# Altium PCB OpenMoteSTM-Border.PcbDoc (part 2 of 2)
Units mil, origin at the board's own origin, x right, y up, seen from the top; angles counter-clockwise.
Board outline 3923 x 2926 mil, 2 copper layers (Top Layer, Bottom Layer); 88 components, 131 nets, 421 pads, 102 vias.
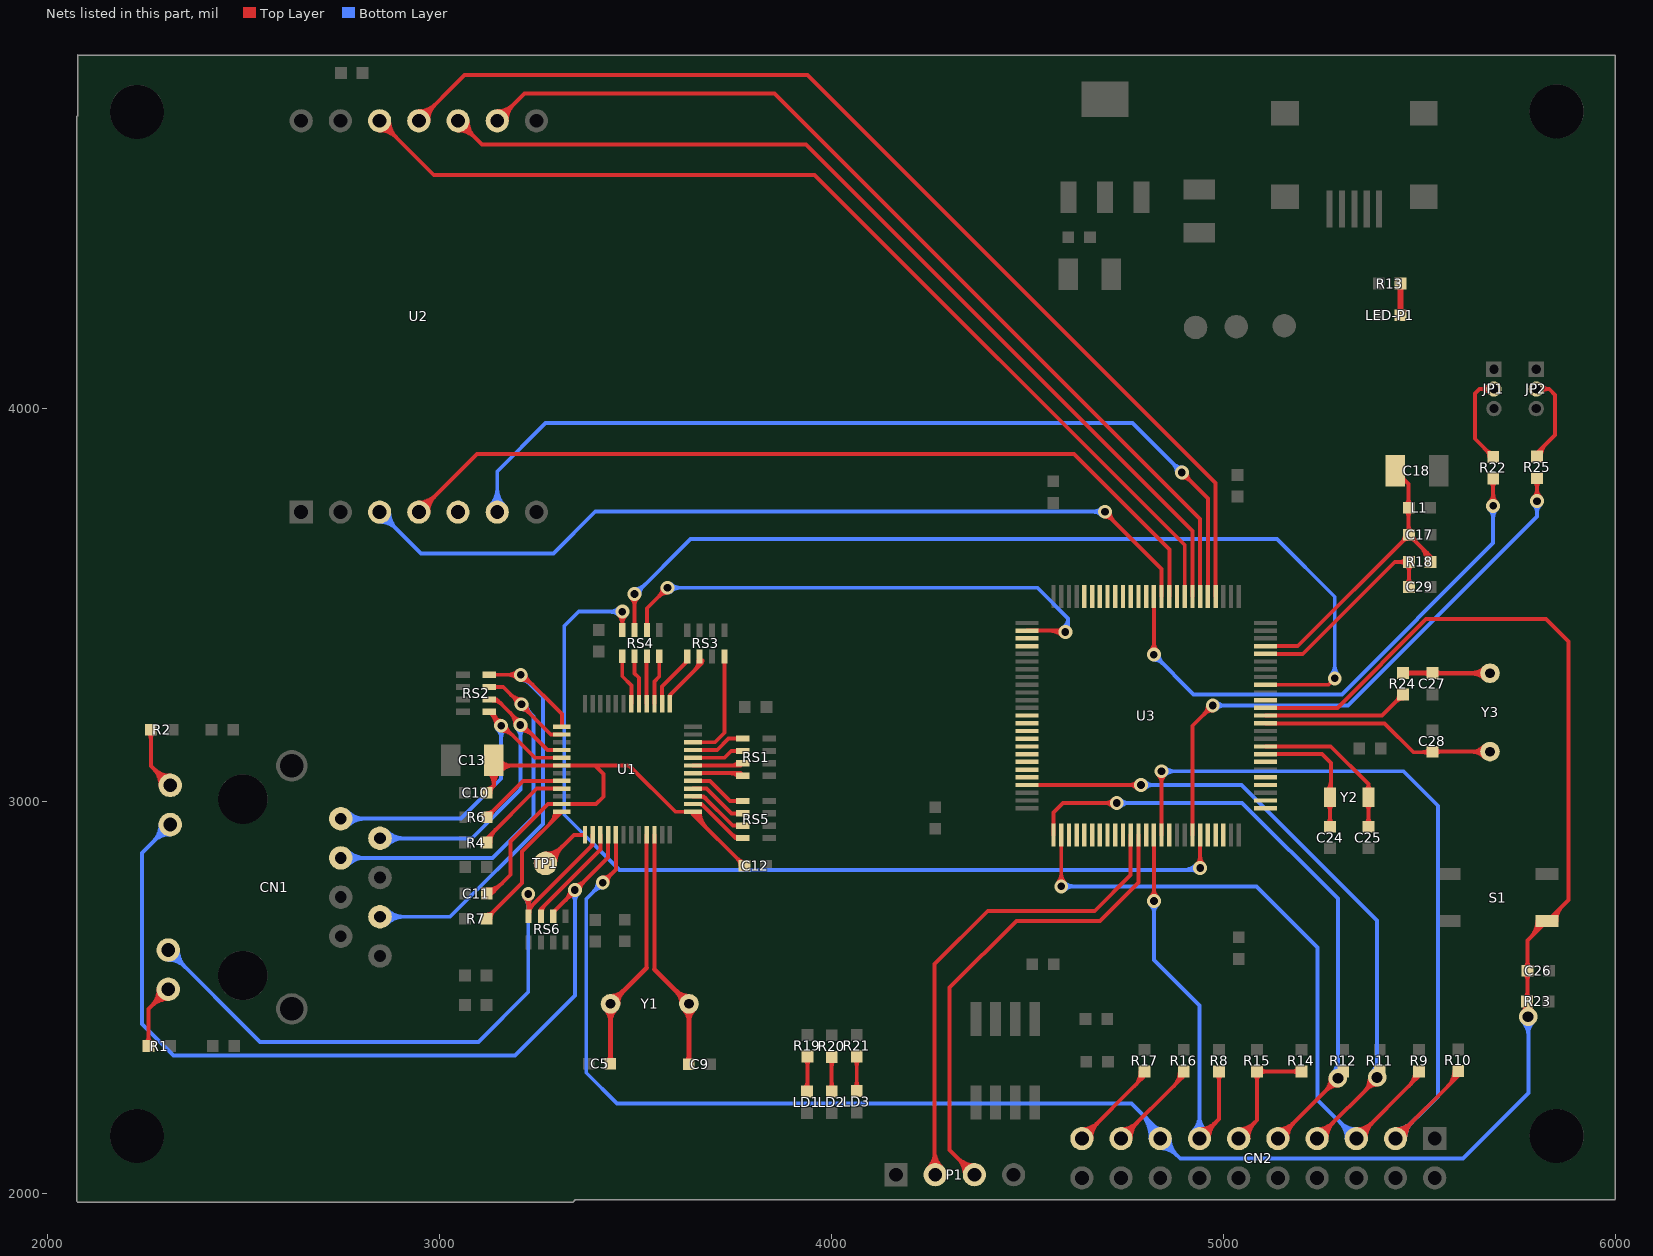
[diagram p2: the nets of this part, all layers, seen from the top]

## Via types
v1: diameter 35.43, hole 19.68, Top Layer to Bottom Layer, 70 vias
v2: diameter 47.24, hole 27.56, Top Layer to Bottom Layer, 15 vias
v3: diameter 47.24, hole 23.62, Top Layer to Bottom Layer, 14 vias
v4: diameter 35.43, hole 35.43, Top Layer to Bottom Layer, 2 vias
v5: diameter 31.5, hole 19.68, Top Layer to Bottom Layer, 1 vias

## Nets (pads, with @x,y where several pads share a name; then routed paths per layer and width w, separated by ;. In a path a pad name is that pad's centre, name@x,y a point inside that pad or via, vN(x,y) a via of type N, cw(c..) or ccw(c..) an arc to the next point about the centre after c; other vN are vias at no path point) (continued)
MII_TXD1: RS4.3 U3.52 | length 1513.2
  Top Layer w10: RS4.3@3528.75,3436.5 3528.75,3491.75 v1(3581,3544) ; v1@3568.28,3544 cw(c3537.58,3544) 3559.29,3522.29 cw(c3581,3500.58) v1@3581,3531.28 ; U3.52@4498.4,3434 U3.52@4497.87,3434.54 4592.46,3434.54 v1(4596,3431) ; 4556.76,3434.54 cw(c4556.76,3391.76) v1@4587.01,3422.01 ; 4573.83,3434.54 ccw(c4573.83,3453.17) v1@4587.01,3439.99
  Bottom Layer w10: v1(3581,3544) 4525,3544 4603,3466 ; v1@3589.99,3535.01 cw(c3611.7,3513.3) 3611.7,3544 cw(c3611.7,3574.7) v1@3589.99,3552.99 ; v1@4589.41,3441.88 ccw(c4574.8,3466) 4603,3466 ; v1@4594.59,3433.32 ccw(c4585.55,3448.25) 4603,3448.25 ; v1(4596,3431) 4603,3438 4603,3466
MII_TXD2: RS4.5 U3.17 | length 2533.6
  Top Layer w10: v1@3488.01,3519.01 cw(c3466.3,3497.3) 3497,3497.3 cw(c3527.7,3497.3) v1@3505.99,3519.01 ; v1(3497,3528) 3497,3436.75 RS4.5@3497.25,3436.5 ; U3.17@5106.13,3296.74 5266.74,3296.74 v1(5283,3313)
  Bottom Layer w10: v1(3497,3528) 3498,3527 3499,3527 3640,3668 5136,3668 5283,3521 v1(5283,3313) ; v1@3497,3540.72 ccw(c3497,3578.66) 3523.83,3551.83 ; v1@3509.72,3528 cw(c3533.17,3528) 3516.59,3544.59 ; v1@5274.01,3321.99 ccw(c5252.3,3343.7) 5283,3343.7 ccw(c5313.7,3343.7) v1@5291.99,3321.99
MII_TXD3: RS4.7 U3.95 | length 2669.9
  Top Layer w10: v1@3457.01,3474.01 cw(c3435.89,3452.89) RS4.7@3465.76,3452.89 ; RS4.7@3465.76,3436.5 3465.76,3482.76 v1(3466,3483) ; RS4.7@3465.76,3451.71 cw(c3497.29,3451.71) v1@3474.99,3474.01 ; v1@4930.8,2838.2 ccw(c4909.1,2859.91) 4939.8,2859.91 ccw(c4970.5,2859.91) v1@4948.79,2838.2 ; v1(4939.8,2829.2) U3.95@4939.8,2913.87
  Bottom Layer w10: v1@3457.01,3474.01 ccw(c3435.3,3452.3) 3435.3,3483 ccw(c3435.3,3513.7) v1@3457.01,3491.99 ; v1(3466,3483) 3355,3483 3318,3446 3318,2965 3459,2824 4934.59,2824 v1(4939.8,2829.2) ; 4896.53,2824 ccw(c4896.53,2872.47) v1@4930.8,2838.2 ; 4920.67,2824 ccw(c4920.67,2848.33) v1@4937.87,2831.13 ; 4921.66,2824 cw(c4921.66,2811.07) v1@4930.8,2820.21
NetC5_2: C5.2 U1.33 Y1.1 | length 800.3
  Top Layer w10: 3528.21,2575.21 U1.33@3528.21,2913.68
  Top Layer w12: Y1.1@3422.56,2469.56 cw(c3390.13,2437.13) 3436,2437.13 cw(c3481.87,2437.13) Y1.1@3449.44,2469.56 ; C5.2@3429.14,2336.36 ccw(c3412.57,2352.93) 3436,2352.93 ; C5.2@3435.5,2330 3436,2330.5 Y1.1@3436,2483 3528.21,2575.21 ; 3436,2350.52 ccw(c3456.02,2350.52) C5.2@3441.86,2336.36 ; Y1.1@3436,2502 ccw(c3436,2547.87) 3468.44,2515.44 ccw(c3500.87,2483) Y1.1@3455,2483
NetC9_2: C9.2 U1.34 Y1.2 | length 799.6
  Top Layer w10: 3547.9,2571.1 U1.34@3547.9,2913.68
  Top Layer w12: 3547.9,2571.1 Y1.2@3636,2483 3636,2329.5 C9.2@3635.5,2329 ; Y1.2@3617,2483 ccw(c3571.13,2483) 3603.56,2515.44 ccw(c3636,2547.87) Y1.2@3636,2502 ; Y1.2@3622.56,2469.56 cw(c3590.13,2437.13) 3636,2437.13 cw(c3681.87,2437.13) Y1.2@3649.44,2469.56 ; C9.2@3629.14,2335.36 ccw(c3612.57,2351.93) 3636,2351.93 ; 3636,2349.52 ccw(c3656.02,2349.52) C9.2@3641.86,2335.36
NetC10_2: C10.2 C11.2 C12.2 C13.1 U1.18 U1.23 U1.37 | length 1827
  Top Layer w10: C10.2@3119.5,3021 3138.41,3039.91 3138.41,3118.87 3166.44,3090.84 ; C10.2@3119.5,3031 ccw(c3119.5,3055.14) 3136.57,3038.07 ccw(c3153.64,3021) C10.2@3129.5,3021 ; C11.2@3120.5,2774 ccw(c3120.5,2828.32) 3158.91,2789.91 ; C13.1@3124.26,3074.73 cw(c3090.12,3040.59) 3138.41,3040.59 cw(c3186.69,3040.59) 3152.55,3074.73 cw(c3191.44,3035.84) 3191.44,3090.84 ; 3141.84,2772.84 cw(c3120.5,2794.18) C11.2@3120.5,2764 3133,2764 3181,2812 3181,2897 3276.42,2992.42 U1.23@3311.68,2992.42 3399.42,2992.42 3418,3011 3418,3068.84 3396,3090.84 ; C13.1@3145.48,3081.8 cw(c3167.3,3059.98) 3167.3,3090.84 ; C13.1@3152.55,3103.02 ccw(c3181.94,3132.41) 3181.94,3090.84 ; C13.1@3156.61,3097.17 ccw(c3166.44,3101.65) 3166.44,3090.84 ; C13.1@3157.83,3084.09 cw(c3166.44,3081.98) 3166.44,3090.84 ; U1.37@3643.82,2972.73 ccw(c3653.61,2972.73) 3646.69,2965.81 ; U1.37@3653.82,2972.73 ccw(c3687.76,2972.73) 3663.76,2948.74 ; U1.37@3663.82,2972.73 ccw(c3721.9,2972.73) 3680.83,2931.67 ; C12.2@3767.5,2835 ccw(c3743.36,2835) 3760.43,2852.07 ccw(c3777.5,2869.14) C12.2@3777.5,2845 ; C12.2@3777.5,2835 3646.32,2966.18 U1.37@3646.32,2972.73 3601.27,2972.73 3483.16,3090.84 3396,3090.84 ; 3166.44,3090.84 U1.18@3311.68,3090.84 3396,3090.84
NetC27_1: C27.1 R24.2 Y3.2 | length 396.7
  Top Layer w12: R24.2@5457,3326.5 C27.1@5532,3326.5 5532.5,3326 Y3.2@5679,3326 ; R24.2@5463.36,3320.14 cw(c5478.73,3304.77) 5478.73,3326.5 cw(c5478.73,3348.23) R24.2@5463.36,3332.86 ; C27.1@5525.64,3320.14 ccw(c5510.27,3304.77) 5510.27,3326.5 ccw(c5510.27,3348.23) C27.1@5525.64,3332.86 ; C27.1@5538.36,3320.14 cw(c5552.52,3305.98) 5552.52,3326 ; C27.1@5538.36,3332.86 ccw(c5554.94,3349.43) 5554.94,3326 ; Y3.2@5665.56,3312.56 ccw(c5633.13,3280.13) 5633.13,3326 ccw(c5633.13,3371.87) Y3.2@5665.56,3339.44
NetC28_1: C28.1 U3.12 Y3.1 | length 755.8
  Top Layer w10: U3.12@5106.13,3198.31 5409.69,3198.31 5483.5,3124.5 5531,3124.5 C28.1@5532,3125.5 5532.5,3126 Y3.1@5679,3126 ; 5505.44,3124.5 ccw(c5505.44,3152.06) C28.1@5524.93,3132.57 ; 5510.27,3124.5 cw(c5510.27,3103.77) C28.1@5524.93,3118.43 ; C28.1@5539.07,3118.43 cw(c5557.35,3100.15) 5557.35,3126 ; C28.1@5539.07,3132.57 ccw(c5554.94,3148.43) 5554.94,3126 ; Y3.1@5664.86,3111.86 ccw(c5630.72,3077.72) 5630.72,3126 ccw(c5630.72,3174.28) Y3.1@5664.86,3140.14
NetCN1_1: CN1.1 RS2.8 U1.17 | length 1140
  Top Layer w10: RS2.8@3126.5,3227.76 3243.73,3110.53 U1.17@3311.68,3110.53 ; RS2.8@3131.58,3222.68 cw(c3100.89,3192) v1@3144.28,3192 ; RS2.8@3139,3227.76 ccw(c3169.18,3227.76) v1@3147.84,3206.42 ; 3144.26,3209.99 ccw(c3157,3222.73) v1@3157,3204.72 ; v1@3157,3179.28 cw(c3157,3135.89) 3187.68,3166.58 ; v1@3169.72,3192 ccw(c3187.73,3192) 3174.99,3179.26
  Bottom Layer w10: CN1.1@2748,2955 3055,2955 3157,3057 v1(3157,3192) ; CN1.1@2758.61,2944.39 cw(c2784.21,2918.79) 2784.21,2955 cw(c2784.21,2991.21) CN1.1@2758.61,2965.61 ; CN1.1@2765.68,2937.32 cw(c2808.36,2894.64) 2808.36,2955 cw(c2808.36,3015.36) CN1.1@2765.68,2972.68 ; v1@3148.01,3183.01 cw(c3126.3,3161.3) 3157,3161.3 cw(c3187.7,3161.3) v1@3165.99,3183.01
NetCN1_2: CN1.2 RS2.6 U1.16 | length 1147.3
  Top Layer w10: RS2.6@3126.5,3259.25 3145.75,3259.25 3274.79,3130.21 U1.16@3311.68,3130.21 ; RS2.6@3136.13,3256.38 cw(c3136.13,3226.21) 3157.46,3247.54 ; RS2.6@3137.38,3256.67 cw(c3142.41,3246.29) 3150.56,3254.44 ; 3180.76,3224.24 cw(c3150.51,3194) v1@3193.28,3194 ; 3192.83,3212.17 ccw(c3206,3225.35) v1@3206,3206.72 ; v1@3206,3181.28 cw(c3206,3138.51) 3236.24,3168.76 ; v1@3218.72,3194 ccw(c3237.35,3194) 3224.17,3180.83
  Bottom Layer w10: CN1.2@2848,2905 3082,2905 3206,3029 v1(3206,3194) ; CN1.2@2858.61,2894.39 cw(c2884.21,2868.79) 2884.21,2905 cw(c2884.21,2941.21) CN1.2@2858.61,2915.61 ; CN1.2@2865.68,2887.32 cw(c2908.36,2844.64) 2908.36,2905 cw(c2908.36,2965.36) CN1.2@2865.68,2922.68 ; v1@3197.01,3185.01 cw(c3175.3,3163.3) 3206,3163.3 cw(c3236.7,3163.3) v1@3214.99,3185.01
NetCN1_3: CN1.3 RS2.4 U1.14 | length 1367.1
  Top Layer w10: RS2.4@3126.5,3290.75 3162.25,3290.75 3283.42,3169.58 U1.14@3311.68,3169.58 ; 3182.17,3270.83 ccw(c3209,3297.66) v1@3209,3259.72 ; 3189.41,3263.59 cw(c3172.83,3247) v1@3196.28,3247 ; v1@3209,3234.28 cw(c3209,3210.83) 3225.59,3227.41 ; v1@3221.72,3247 ccw(c3259.66,3247) 3232.83,3220.17
  Bottom Layer w10: CN1.3@2748,2855 3135,2855 3240,2960 3240,3216 v1(3209,3247) ; CN1.3@2758.61,2844.39 cw(c2784.21,2818.79) 2784.21,2855 cw(c2784.21,2891.21) CN1.3@2758.61,2865.61 ; CN1.3@2765.68,2837.32 cw(c2808.36,2794.64) 2808.36,2855 cw(c2808.36,2915.36) CN1.3@2765.68,2872.68 ; v1@3209,3234.28 cw(c3209,3203.58) 3230.71,3225.29 cw(c3252.42,3247) v1@3221.72,3247
NetCN1_6: CN1.6 RS2.2 U1.13 | length 1473.8
  Top Layer w10: RS2.2@3126.5,3322.24 3211.76,3322.24 3311.68,3222.32 U1.13@3311.68,3189.27 ; 3175.71,3322.24 cw(c3175.71,3290.71) v1@3198.01,3313.01 ; 3176.89,3322.24 ccw(c3176.89,3352.11) v1@3198.01,3330.99 ; v1@3207,3309.28 cw(c3207,3266.51) 3237.24,3296.76 ; v1@3219.72,3322 ccw(c3238.35,3322) 3225.17,3308.83
  Bottom Layer w10: CN1.6@2848,2705 3027,2705 3264,2942 3264,3265 v1(3207,3322) ; CN1.6@2858.61,2694.39 cw(c2884.21,2668.79) 2884.21,2705 cw(c2884.21,2741.21) CN1.6@2858.61,2715.61 ; CN1.6@2865.68,2687.32 cw(c2908.36,2644.64) 2908.36,2705 cw(c2908.36,2765.36) CN1.6@2865.68,2722.68 ; v1@3207,3309.28 cw(c3207,3278.58) 3228.71,3300.29 cw(c3250.42,3322) v1@3219.72,3322
NetCN1_9: CN1.9 R2.1 | length 352.1
  Top Layer w10: R2.1@2256.43,3174.93 cw(c2239.36,3157.86) 2263.5,3157.86 cw(c2287.64,3157.86) R2.1@2270.57,3174.93 ; R2.1@2263.5,3182 2263.5,3089.5 CN1.9@2313,3040 ; CN1.9@2288,3040 ccw(c2227.64,3040) 2270.32,3082.68 ccw(c2313,3125.36) CN1.9@2313,3065 ; CN1.9@2298,3040 ccw(c2261.79,3040) 2287.39,3065.61 ccw(c2313,3091.21) CN1.9@2313,3055
NetCN1_10: CN1.10 RS6.3 U1.28 | length 2569.9
  Top Layer w10: RS6.3@3289.75,2706.5 3289.75,2715.75 3429.79,2855.79 U1.28@3429.79,2913.68 ; 3321.88,2747.88 ccw(c3296.75,2773) v1@3332.28,2773 ; 3326.71,2752.71 cw(c3345,2734.41) v1@3345,2760.28 ; v1@3345,2785.72 ccw(c3345,2821.25) 3370.12,2796.12 ; v1@3357.72,2773 cw(c3383.59,2773) 3365.29,2791.29
  Bottom Layer w10: CN1.10@2288,2940 cw(c2227.64,2940) 2270.32,2897.32 cw(c2313,2854.64) CN1.10@2313,2915 ; CN1.10@2298,2940 cw(c2261.79,2940) 2287.39,2914.39 cw(c2313,2888.79) CN1.10@2313,2925 ; CN1.10@2313,2940 2241,2868 2241,2431 2321,2351 3192,2351 3345,2504 v1(3345,2773) ; v1@3336.01,2764.01 cw(c3314.3,2742.3) 3345,2742.3 cw(c3375.7,2742.3) v1@3353.99,2764.01
NetCN1_11: CN1.11 RS6.7 U1.26 | length 1932.6
  Top Layer w10: v1@3217.01,2754.01 cw(c3195.3,2732.3) 3226,2732.3 cw(c3256.7,2732.3) v1@3234.99,2754.01 ; v1(3226,2763) 3226,2725.51 3226.76,2724.76 ; RS6.7@3226.76,2706.5 3226.76,2724.76 ; RS6.7@3229.63,2716.13 cw(c3257.4,2716.13) 3237.76,2735.76 ; 3383.72,2881.72 ccw(c3368.77,2896.68) U1.26@3389.92,2896.68 ; U1.26@3390.42,2913.68 3390.42,2888.42 3226.76,2724.76 ; 3226,2724.89 ccw(c3235.52,2724.89) 3228.79,2718.16 cw(c3235.52,2724.89) 3226,2724.89
  Bottom Layer w10: CN1.11@2308,2595 cw(c2308,2534.64) 2350.68,2577.32 cw(c2393.36,2620) CN1.11@2333,2620 ; CN1.11@2308,2605 cw(c2308,2568.79) 2333.61,2594.39 cw(c2359.21,2620) CN1.11@2323,2620 ; CN1.11@2308,2620 2542,2386 3099,2386 3226,2513 v1(3226,2763) ; v1@3217.01,2754.01 cw(c3195.3,2732.3) 3226,2732.3 cw(c3256.7,2732.3) v1@3234.99,2754.01
NetCN1_12: CN1.12 R1.1 | length 355.5
  Top Layer w10: R1.1@2250.43,2382.07 ccw(c2233.36,2399.14) 2257.5,2399.14 ccw(c2281.64,2399.14) R1.1@2264.57,2382.07 ; R1.1@2257.5,2375 2257.5,2469.5 CN1.12@2308,2520 ; CN1.12@2283,2520 cw(c2222.64,2520) 2265.32,2477.32 cw(c2308,2434.64) CN1.12@2308,2495 ; CN1.12@2293,2520 cw(c2256.79,2520) 2282.39,2494.39 cw(c2308,2468.79) CN1.12@2308,2505
NetCN2_11: CN2.11 R14.1 R15.2 | length 565.8
  Top Layer w10: CN2.11@5038,2139 5085,2186 R15.2@5085,2310.5 R14.1@5198,2310.5 ; CN2.11@5038,2153.53 ccw(c5038,2188.6) 5062.8,2163.8 ccw(c5087.6,2139) CN2.11@5052.53,2139 ; CN2.11@5038,2163.53 ccw(c5038,2222.74) 5079.87,2180.87 ccw(c5121.74,2139) CN2.11@5062.53,2139 ; R15.2@5077.93,2303.43 cw(c5060.86,2286.36) 5085,2286.36 cw(c5109.14,2286.36) 5092.07,2303.43 cw(c5109.14,2286.36) 5109.14,2310.5 cw(c5109.14,2334.64) R15.2@5092.07,2317.57 ; R14.1@5190.93,2303.43 ccw(c5173.86,2286.36) 5173.86,2310.5 ccw(c5173.86,2334.64) R14.1@5190.93,2317.57
NetCN2_17: CN2.17 R16.1 | length 452
  Top Layer w10: CN2.17@4738,2139 4894.5,2295.5 4894.5,2307 R16.1@4898,2310.5 ; CN2.17@4738,2153.53 ccw(c4738,2188.6) 4762.8,2163.8 ccw(c4787.6,2139) CN2.17@4752.53,2139 ; CN2.17@4738,2163.53 ccw(c4738,2222.74) 4779.87,2180.87 ccw(c4821.74,2139) CN2.17@4762.53,2139 ; 4872.8,2273.8 ccw(c4836.09,2310.5) R16.1@4888,2310.5 ; 4889.87,2290.87 ccw(c4870.24,2310.5) R16.1@4898,2310.5 ; R16.1@4894.5,2310.5 R16.1@4898,2310.5
NetCN2_19: CN2.19 R17.1 | length 452
  Top Layer w10: CN2.19@4638,2139 4794.5,2295.5 4794.5,2307 R17.1@4798,2310.5 ; CN2.19@4638,2153.53 ccw(c4638,2188.6) 4662.8,2163.8 ccw(c4687.6,2139) CN2.19@4652.53,2139 ; CN2.19@4638,2163.53 ccw(c4638,2222.74) 4679.87,2180.87 ccw(c4721.74,2139) CN2.19@4662.53,2139 ; 4772.8,2273.8 ccw(c4736.09,2310.5) R17.1@4788,2310.5 ; 4789.87,2290.87 ccw(c4770.24,2310.5) R17.1@4798,2310.5 ; R17.1@4794.5,2310.5 R17.1@4798,2310.5
NetJP1_2: JP1.2 R22.2 | length 328.1
  Top Layer w10: R22.2@5677,3877.5 ccw(c5652.86,3877.5) 5669.93,3894.57 ccw(c5687,3911.64) R22.2@5687,3887.5 ; JP1.2@5678.62,4040.62 ccw(c5653.55,4015.55) 5653.55,4051 ccw(c5653.55,4086.45) JP1.2@5678.62,4061.38 ; R22.2@5687,3877.5 5640.54,3923.96 5640.54,4039.54 5652,4051 JP1.2@5689,4051
NetJP2_2: JP2.2 R25.1 | length 335.6
  Top Layer w10: JP2.2@5797,4051 5830,4051 ; 5805.72,3894.72 ccw(c5821.94,3878.5) R25.1@5799,3878.5 5799,3888 5845,3934 5845,4036 5830,4051 ; JP2.2@5807.91,4041.17 cw(c5830,4021.27) 5830,4051 ; JP2.2@5807.91,4060.83 ccw(c5830,4080.73) 5830,4051 ; R25.1@5809,3878.5 cw(c5856.08,3878.5) 5822.79,3911.79
NetLD1_1: LD1.1 R19.2 | length 165.3
  Top Layer w10: LD1.1@3929.93,2266.57 ccw(c3910.44,2286.06) 3938,2286.06 ; R19.2@3930.93,2341.43 cw(c3913.86,2324.36) 3938,2324.36 cw(c3962.14,2324.36) R19.2@3945.07,2341.43 ; LD1.1@3937,2259.5 3938,2260.5 R19.2@3938,2348.5 ; 3938,2281.23 ccw(c3958.73,2281.23) LD1.1@3944.07,2266.57
NetLD2_1: LD2.1 R20.2 | length 163.8
  Top Layer w10: LD2.1@3992.93,2266.57 ccw(c3975.86,2283.64) 4000,2283.64 ccw(c4024.14,2283.64) LD2.1@4007.07,2266.57 ; R20.2@3992.93,2340.43 cw(c3975.86,2323.36) 4000,2323.36 cw(c4024.14,2323.36) R20.2@4007.07,2340.43 ; LD2.1@4000,2259.5 R20.2@4000,2347.5
NetLD3_1: LD3.1 R21.2 | length 163.8
  Top Layer w10: LD3.1@4056.93,2267.57 ccw(c4039.86,2284.64) 4064,2284.64 ccw(c4088.14,2284.64) LD3.1@4071.07,2267.57 ; R21.2@4056.93,2341.43 cw(c4039.86,2324.36) 4064,2324.36 cw(c4088.14,2324.36) R21.2@4071.07,2341.43 ; LD3.1@4064,2260.5 R21.2@4064,2348.5
NetLED-P1_1: LED-P1.1 R13.1 | length 137.9
  Top Layer w15: LED-P1.1@5445.2,4244.3 ccw(c5432.39,4257.11) 5450.5,4257.11 ccw(c5468.61,4257.11) LED-P1.1@5455.8,4244.3 ; R13.1@5445.2,4314.7 cw(c5432.39,4301.89) 5450.5,4301.89 cw(c5468.61,4301.89) R13.1@5455.8,4314.7 ; LED-P1.1@5450.5,4239 R13.1@5450.5,4320
NetR4_1: R4.1 U1.21 | length 309.8
  Top Layer w10: 3126.22,2910.22 ccw(c3142.43,2894) R4.1@3119.5,2894 3119.5,2903.5 3247.79,3031.79 U1.21@3311.68,3031.79 ; R4.1@3129.5,2894 cw(c3176.58,2894) 3143.29,2927.29
NetR6_1: R6.1 U1.20 | length 267.4
  Top Layer w10: R6.1@3120.5,2959 3212.97,3051.47 U1.20@3311.68,3051.47 ; R6.1@3120.5,2969 ccw(c3120.5,2993.14) 3137.57,2976.07 ccw(c3154.64,2959) R6.1@3130.5,2959
NetR7_2: R7.2 U1.24 | length 437.7
  Top Layer w10: R7.2@3119.5,2700 3210,2790.5 3210,2871.05 U1.24@3311.68,2972.73 ; R7.2@3119.5,2710 ccw(c3119.5,2734.14) 3136.57,2717.07 ccw(c3153.64,2700) R7.2@3129.5,2700 ; 3281.8,2942.86 ccw(c3251.93,2972.73) U1.24@3294.18,2972.73 ; 3298.87,2959.93 ccw(c3286.07,2972.73) U1.24@3304.18,2972.73
NetR24_1: R24.1 U3.13 | length 410.9
  Top Layer w10: U3.13@5106.13,3218 5403.5,3218 R24.1@5457,3271.5 ; R24.1@5447,3271.5 cw(c5422.86,3271.5) 5439.93,3254.43 cw(c5457,3237.36) R24.1@5457,3261.5
NetR25_2: R25.2 U3.94 | length 1706.6
  Top Layer w10: U3.94@4920.11,2913.87 4920.11,3192.11 v1(4972,3244) ; v1@4959.28,3244 cw(c4928.58,3244) 4950.29,3222.29 cw(c4972,3200.58) v1@4972,3231.28 ; v1@5790.01,3773.99 ccw(c5768.3,3795.7) 5799,3795.7 ccw(c5829.7,3795.7) v1@5807.99,3773.99 ; R25.2@5791.93,3816.43 cw(c5774.86,3799.36) 5799,3799.36 cw(c5823.14,3799.36) R25.2@5806.07,3816.43 ; v1(5799,3765) R25.2@5799,3823.5
  Bottom Layer w10: v1(4972,3244) 5317,3244 5799,3726 v1(5799,3765) ; v1@4980.99,3235.01 cw(c5002.7,3213.3) 5002.7,3244 cw(c5002.7,3274.7) v1@4980.99,3252.99 ; v1@5790.01,3756.01 cw(c5768.3,3734.3) 5799,3734.3 cw(c5829.7,3734.3) v1@5807.99,3756.01
NetRS1_1: RS1.1 U1.45 | length 139.2
  Top Layer w10: U1.45@3646.32,3130.21 3708.21,3130.21 3737.24,3159.24 RS1.1@3773.5,3159.24
NetRS1_3: RS1.3 U1.44 | length 134.3
  Top Layer w10: U1.44@3646.32,3110.53 3726.53,3110.53 3743.75,3127.75 RS1.3@3773.5,3127.75
NetRS1_5: RS1.5 U1.43 | length 149.4
  Top Layer w10: U1.43@3646.32,3090.84 3768.09,3090.84 RS1.5@3773.5,3096.25 ; 3743.88,3090.84 ccw(c3743.88,3116.25) RS1.5@3761.84,3098.28
NetRS1_7: RS1.7 U1.42 | length 153
  Top Layer w10: U1.42@3646.32,3071.16 3767.1,3071.16 RS1.7@3773.5,3064.76 RS1.7@3773.1,3065.16 ; 3741.48,3071.16 cw(c3741.48,3042.36) RS1.7@3761.84,3062.72
NetRS3_2: RS3.2 U1.46 | length 284.3
  Top Layer w10: U1.46@3646.32,3149.9 3701.9,3149.9 3726.24,3174.24 RS3.2@3726.24,3368.5
NetRS3_6: RS3.6 U1.1 | length 201.8
  Top Layer w10: U1.1@3587.27,3248.32 3587.27,3270.27 3663.25,3346.25 RS3.6@3663.25,3368.5 ; U1.1@3587.77,3265.32 cw(c3600.91,3265.32) 3591.62,3274.62 ; 3649.42,3332.42 ccw(c3622.97,3358.87) RS3.6@3660.38,3358.87 ; 3666.49,3349.49 ccw(c3657.11,3358.87) RS3.6@3670.38,3358.87
NetRS3_8: RS3.8 U1.2 | length 156.2
  Top Layer w10: U1.2@3567.58,3248.32 3567.58,3292.58 3631.76,3356.76 RS3.8@3631.76,3368.5 ; 3625.35,3350.35 ccw(c3616.83,3358.87) RS3.8@3628.88,3358.87
NetRS4_2: RS4.2 U1.3 | length 126.3
  Top Layer w10: U1.3@3547.9,3248.32 3547.9,3304.9 3560.24,3317.24 RS4.2@3560.24,3369.5
NetRS4_4: RS4.4 U1.4 | length 128.6
  Top Layer w10: RS4.4@3528,3368.75 RS4.4@3528.21,3368.96 ; U1.4@3528.21,3248.32 RS4.4@3528.21,3368.96 ; 3528.21,3351.64 cw(c3536.98,3351.64) RS4.4@3530.78,3357.84 ; RS4.4@3528.75,3369.5 RS4.4@3528.21,3368.96
NetRS4_6: RS4.6 U1.5 | length 128.3
  Top Layer w10: RS4.6@3499,3367.75 RS4.6@3497.25,3369.5 3497.25,3325.75 3508.53,3314.47 U1.5@3508.53,3248.32
NetRS4_8: RS4.8 U1.6 | length 132.5
  Top Layer w10: RS4.8@3464.6,3368.34 RS4.8@3465.76,3369.5 3465.76,3318.24 3489,3295 3489,3248.48 U1.6@3488.84,3248.32
NetRS5_1: RS5.1 U1.41 | length 148.4
  Top Layer w10: U1.41@3646.32,3051.47 3689.53,3051.47 3740.76,3000.24 RS5.1@3773.5,3000.24
NetRS5_3: RS5.3 U1.40 | length 153.3
  Top Layer w10: U1.40@3646.32,3031.79 3681.21,3031.79 3744.25,2968.75 RS5.3@3773.5,2968.75
NetRS5_5: RS5.5 U1.39 | length 192.8
  Top Layer w10: U1.39@3646.32,3012.1 3672.9,3012.1 3747.75,2937.25 RS5.5@3773.5,2937.25 ; U1.39@3663.32,3011.6 cw(c3663.32,2987.28) 3680.52,3004.48 ; U1.39@3663.42,3011.61 cw(c3666.55,2996.18) 3677.68,3007.32
NetRS5_7: RS5.7 U1.38 | length 195.8
  Top Layer w10: U1.38@3646.32,2992.42 3667.58,2992.42 3754.24,2905.76 RS5.7@3773.5,2905.76 ; U1.38@3663.32,2991.92 cw(c3663.32,2980.43) 3671.45,2988.55 ; 3742.53,2917.47 ccw(c3763.87,2938.82) RS5.7@3763.87,2908.63
NetRS6_5: RS6.5 U1.27 | length 290.9
  Top Layer w10: RS6.5@3258.25,2706.5 3258.25,2724.25 3410.1,2876.1 U1.27@3410.1,2913.68 ; RS6.5@3261.13,2716.13 cw(c3287.68,2716.13) 3268.9,2734.9
NetTP1_1: TP1.1 U1.25 | length 282.5
  Top Layer w10: TP1.1@3270,2841 3342.68,2913.68 U1.25@3370.73,2913.68 ; TP1.1@3270,2856 ccw(c3270,2892.21) 3295.61,2866.61 ccw(c3321.21,2841) TP1.1@3285,2841 ; TP1.1@3270,2866 ccw(c3270,2926.36) 3312.68,2883.68 ccw(c3355.36,2841) TP1.1@3295,2841
PA4: U2.11 U3.29 | length 2948.7
  Top Layer w10: U2.11@2947,4735 3064,4852 3938,4852 4979.17,3810.83 U3.29@4979.17,3522.13 ; U2.11@2947,4749.53 ccw(c2947,4784.6) 2971.8,4759.8 ccw(c2996.6,4735) U2.11@2961.53,4735 ; U2.11@2947,4759.53 ccw(c2947,4818.74) 2988.87,4776.87 ccw(c3030.74,4735) U2.11@2971.53,4735
PA5: U2.6 U3.30 | length 2541.1
  Top Layer w10: v1@4893,3825.28 cw(c4893,3794.58) 4914.71,3816.29 cw(c4936.42,3838) v1@4905.72,3838 ; v1(4893,3838) 4959.48,3771.52 U3.30@4959.48,3522.13
  Bottom Layer w10: U2.6@3129.66,3754.34 ccw(c3087.79,3796.21) 3147,3796.21 ccw(c3206.21,3796.21) U2.6@3164.34,3754.34 ; U2.6@3136.73,3747.27 ccw(c3111.93,3772.07) 3147,3772.07 ccw(c3182.07,3772.07) U2.6@3157.27,3747.27 ; U2.6@3147,3737 3147,3841 3270,3964 4767,3964 v1(4893,3838) ; v1@4880.28,3838 ccw(c4849.58,3838) 4871.29,3859.71 ccw(c4893,3881.42) v1@4893,3850.72
PA6: U2.9 U3.31 | length 2616.7
  Top Layer w10: U2.9@3147,4735 3217,4805 3854,4805 4939.8,3719.2 U3.31@4939.8,3522.13 ; U2.9@3147,4749.53 ccw(c3147,4784.6) 3171.8,4759.8 ccw(c3196.6,4735) U2.9@3161.53,4735 ; U2.9@3147,4759.53 ccw(c3147,4818.74) 3188.87,4776.87 ccw(c3230.74,4735) U2.9@3171.53,4735
PA7: U2.10 U3.32 | length 2621.3
  Top Layer w10: U2.10@3047,4710.47 cw(c3047,4651.26) 3088.87,4693.13 cw(c3130.74,4735) U2.10@3071.53,4735 ; U2.10@3047,4720.47 cw(c3047,4685.4) 3071.8,4710.2 cw(c3096.6,4735) U2.10@3061.53,4735 ; U2.10@3047,4735 3108,4674 3935,4674 4920.11,3688.89 U3.32@4920.11,3522.13
PA8: U3.67
PA9: U3.68
PA10: U3.69
PA11: U3.70
PA12: U3.71
PA13: CN2.7 R11.1 U3.72 | length 2144.7
  Top Layer w10: U3.72@4497.87,3040.83 4788.83,3040.83 v1(4789,3041) ; 4757.9,3040.83 ccw(c4757.9,3072.1) v1@4780.01,3049.99 ; 4758.7,3040.83 cw(c4758.7,3010.7) v1@4780.01,3032.01 ; CN2.7@5238,2139 5398,2299 R11.1@5398,2310.5 cw(c5370.24,2310.5) v2@5389.87,2290.87 ; CN2.7@5238,2153.53 ccw(c5238,2188.6) 5262.8,2163.8 ccw(c5287.6,2139) CN2.7@5252.53,2139 ; CN2.7@5238,2163.53 ccw(c5238,2222.74) 5279.87,2180.87 ccw(c5321.74,2139) CN2.7@5262.53,2139 ; 5357.09,2258.09 ccw(c5320.18,2295) v2@5372.38,2295 ; 5364.33,2265.33 cw(c5391,2238.66) v2@5391,2276.38 ; 5372.8,2273.8 ccw(c5336.09,2310.5) R11.1@5388,2310.5 ; 5374.16,2275.16 ccw(c5354.32,2295) v2@5382.38,2295
  Bottom Layer w10: v1(4789,3041) 5045,3041 5391,2695 v2(5391,2295) ; v1@4797.99,3032.01 cw(c4819.7,3010.3) 4819.7,3041 cw(c4819.7,3071.7) v1@4797.99,3049.99 ; v2@5377.83,2308.17 ccw(c5346.04,2339.96) 5391,2339.96 ccw(c5435.96,2339.96) v2@5404.17,2308.17
PA14: CN2.9 R12.2 U3.76 | length 2030.2
  Top Layer w10: U3.76@4565.78,2913.87 4565.78,2970.78 4590,2995 v1(4727,2995) ; v1@4718.01,2986.01 ccw(c4696.3,2964.3) 4696.3,2995 ccw(c4696.3,3025.7) v1@4718.01,3003.99 ; CN2.9@5138,2139 5291,2292 v2(5291,2293) 5291,2296.5 R12.2@5298,2303.5 ; CN2.9@5138,2153.53 ccw(c5138,2188.6) 5162.8,2163.8 ccw(c5187.6,2139) CN2.9@5152.53,2139 ; CN2.9@5138,2163.53 ccw(c5138,2222.74) 5179.87,2180.87 ccw(c5221.74,2139) CN2.9@5162.53,2139 ; 5258.5,2259.5 ccw(c5225.01,2293) v2@5272.38,2293 ; 5260.92,2261.92 cw(c5291,2231.83) v2@5291,2274.38 ; v2@5284.75,2285.75 ccw(c5259.99,2310.5) R12.2@5295,2310.5 ; v2@5293.25,2294.25 ccw(c5285.15,2302.35) R12.2@5295.75,2306.7 ; R12.2@5298,2299 R12.2@5298,2303.5 ; R12.2@5298,2310.5 R12.2@5298,2303.5 ; R12.2@5305,2310.5 R12.2@5298,2303.5
  Bottom Layer w10: v1(4727,2995) 5047,2995 5291,2751 v2(5291,2293) ; v1@4735.99,2986.01 cw(c4757.7,2964.3) 4757.7,2995 cw(c4757.7,3025.7) v1@4735.99,3003.99 ; v2@5277.83,2306.17 ccw(c5246.04,2337.96) 5291,2337.96 ccw(c5335.96,2337.96) v2@5304.17,2306.17
PA15: CN2.5 R9.1 U3.77 | length 2074.5
  Top Layer w10: v1@4576.47,2791.53 ccw(c4554.76,2813.24) 4585.46,2813.24 ccw(c4616.16,2813.24) v1@4594.46,2791.53 ; v1(4585.46,2782.54) U3.77@4585.46,2913.87 ; CN2.5@5338,2139 5494.5,2295.5 5494.5,2307 R9.1@5498,2310.5 ; CN2.5@5338,2153.53 ccw(c5338,2188.6) 5362.8,2163.8 ccw(c5387.6,2139) CN2.5@5352.53,2139 ; CN2.5@5338,2163.53 ccw(c5338,2222.74) 5379.87,2180.87 ccw(c5421.74,2139) CN2.5@5362.53,2139 ; 5472.8,2273.8 ccw(c5436.09,2310.5) R9.1@5488,2310.5 ; 5489.87,2290.87 ccw(c5470.24,2310.5) R9.1@5498,2310.5 ; R9.1@5494.5,2310.5 R9.1@5498,2310.5
  Bottom Layer w10: v1(4585.46,2782.54) 5083,2782.54 5239,2626.54 5239,2238 CN2.5@5338,2139 ; v1@4594.46,2773.54 cw(c4616.16,2751.84) 4616.16,2782.54 cw(c4616.16,2813.24) v1@4594.46,2791.53 ; CN2.5@5313.47,2139 ccw(c5254.26,2139) 5296.13,2180.87 ccw(c5338,2222.74) CN2.5@5338,2163.53 ; CN2.5@5323.47,2139 ccw(c5288.4,2139) 5313.2,2163.8 ccw(c5338,2188.6) CN2.5@5338,2153.53
PB0: U2.4 U3.35 | length 2344
  Top Layer w10: U2.4@2947,3737 3095,3885 4618,3885 4861.06,3641.95 U3.35@4861.06,3522.13 ; U2.4@2947,3751.53 ccw(c2947,3786.6) 2971.8,3761.8 ccw(c2996.6,3737) U2.4@2961.53,3737 ; U2.4@2947,3761.53 ccw(c2947,3820.74) 2988.87,3778.87 ccw(c3030.74,3737) U2.4@2971.53,3737
PB1: U2.3 U3.36 | length 2456.4
  Top Layer w10: v1@4697,3725.28 cw(c4697,3699.41) 4715.29,3717.71 ; v1@4697,3736 4841.37,3591.63 U3.36@4841.37,3522.13 ; v1@4709.72,3738 ccw(c4745.25,3738) 4720.12,3712.88
  Bottom Layer w10: U2.3@2847,3712.47 cw(c2847,3653.26) 2888.87,3695.13 cw(c2930.74,3737) U2.3@2871.53,3737 ; U2.3@2847,3722.47 cw(c2847,3687.4) 2871.8,3712.2 cw(c2896.6,3737) U2.3@2861.53,3737 ; U2.3@2847,3737 2953,3631 3290,3631 3397,3738 v1(4697,3738) ; v1@4688.01,3729.01 ccw(c4666.3,3707.3) 4666.3,3738 ccw(c4666.3,3768.7) v1@4688.01,3746.99
PB2: R22.1 U3.37 | length 1612.2
  Top Layer w10: v1@4812.69,3382.31 ccw(c4790.98,3404.02) 4821.69,3404.02 ccw(c4852.39,3404.02) v1@4830.68,3382.31 ; v1@4822,3373 v1(4821.69,3373.32) U3.37@4821.69,3522.13 U3.37@4822,3522.45 ; v1@5678.01,3761.99 ccw(c5656.3,3783.7) 5687,3783.7 ccw(c5717.7,3783.7) v1@5695.99,3761.99 ; R22.1@5679.93,3815.43 cw(c5662.86,3798.36) 5687,3798.36 cw(c5711.14,3798.36) R22.1@5694.07,3815.43 ; v1(5687,3753) R22.1@5687,3822.5
  Bottom Layer w10: v1@4821.69,3360.6 cw(c4821.69,3329.9) 4843.39,3351.61 cw(c4865.1,3373.32) v1@4834.4,3373.32 ; v1(4821.69,3373.32) 4923,3272 5301,3272 5687,3658 v1(5687,3753) ; v1@5678.01,3744.01 cw(c5656.3,3722.3) 5687,3722.3 cw(c5717.7,3722.3) v1@5695.99,3744.01
PB3: CN2.13 R8.1 U3.89 | length 1445.8
  Top Layer w10: v1@4813.01,2753.99 ccw(c4791.3,2775.7) 4822,2775.7 ccw(c4852.7,2775.7) v1@4830.99,2753.99 ; U3.89@4821.69,2913.87 4822,2913.55 v1(4822,2745) ; CN2.13@4938,2139 4988,2189 R8.1@4988,2310.5 ; CN2.13@4938,2153.53 ccw(c4938,2188.6) 4962.8,2163.8 ccw(c4987.6,2139) CN2.13@4952.53,2139 ; CN2.13@4938,2163.53 ccw(c4938,2222.74) 4979.87,2180.87 ccw(c5021.74,2139) CN2.13@4962.53,2139 ; R8.1@4980.93,2303.43 cw(c4963.86,2286.36) 4988,2286.36 cw(c5012.14,2286.36) R8.1@4995.07,2303.43
  Bottom Layer w10: v1@4813.01,2736.01 cw(c4791.3,2714.3) 4822,2714.3 cw(c4852.7,2714.3) v1@4830.99,2736.01 ; v1(4822,2745) 4822,2595 4938,2479 CN2.13@4938,2139 ; CN2.13@4920.66,2156.34 ccw(c4878.79,2198.21) 4938,2198.21 ccw(c4997.21,2198.21) CN2.13@4955.34,2156.34 ; CN2.13@4927.73,2149.27 ccw(c4902.93,2174.07) 4938,2174.07 ccw(c4973.07,2174.07) CN2.13@4948.27,2149.27
PB4: CN2.3 R10.1 U3.90 | length 2494.7
  Top Layer w10: v1@4832.38,3067.01 cw(c4810.67,3045.3) 4841.37,3045.3 cw(c4872.07,3045.3) v1@4850.36,3067.01 ; U3.90@4841.37,2913.87 v1(4841.37,3076) ; CN2.3@5438,2139 5598,2299 R10.1@5598,2311.5 cw(c5567.82,2311.5) 5589.16,2290.16 ; CN2.3@5438,2153.53 ccw(c5438,2188.6) 5462.8,2163.8 ccw(c5487.6,2139) CN2.3@5452.53,2139 ; CN2.3@5438,2163.53 ccw(c5438,2222.74) 5479.87,2180.87 ccw(c5521.74,2139) CN2.3@5462.53,2139 ; 5572.09,2273.09 ccw(c5533.68,2311.5) R10.1@5588,2311.5
  Bottom Layer w10: v1(4841.37,3076) 5458,3076 5546,2988 5546,2247 CN2.3@5438,2139 ; v1@4850.36,3067.01 cw(c4872.07,3045.3) 4872.07,3076 cw(c4872.07,3106.7) v1@4850.36,3084.99 ; CN2.3@5438,2153.53 ccw(c5438,2188.6) 5462.8,2163.8 ccw(c5487.6,2139) CN2.3@5452.53,2139 ; CN2.3@5438,2163.53 ccw(c5438,2222.74) 5479.87,2180.87 ccw(c5521.74,2139) CN2.3@5462.53,2139
PB5: U3.91
PB9: U3.96
PB14: U3.53
PB15: U3.54
PC0: U3.15
PC4: U2.12 U3.33 | length 2780.3
  Top Layer w10: U2.12@2847,4710.47 cw(c2847,4651.26) 2888.87,4693.13 cw(c2930.74,4735) U2.12@2871.53,4735 ; U2.12@2847,4720.47 cw(c2847,4685.4) 2871.8,4710.2 cw(c2896.6,4735) U2.12@2861.53,4735 ; U2.12@2847,4735 2985,4597 3956,4597 4900.43,3652.57 U3.33@4900.43,3522.13
PC5: U3.34
PC6: U3.63
PC7: U3.64
PC8: U3.65
PC9: U3.66
PC10: U3.78
PC11: U3.79
PC12: U3.80
PC13: U3.7
PC14: C24.2 U3.8 Y2.1 | length 452.1
  Top Layer w10: U3.8@5106.13,3119.57 5250.43,3119.57 5273,3097 Y2.1@5273,3010 ; Y2.1@5263.5,2992.93 cw(c5245.41,2974.83) 5271,2974.83 ; Y2.1@5263.5,3027.07 ccw(c5240.58,3050) 5273,3050 ; C24.2@5263.93,2941.57 ccw(c5246.86,2958.64) 5271,2958.64 ccw(c5295.14,2958.64) C24.2@5278.07,2941.57 ; C24.2@5271,2934.5 Y2.1@5271,3009.57 ; 5271,2976.88 cw(c5293.69,2976.88) Y2.1@5277.65,2992.93 ; 5273,3038.29 ccw(c5288.86,3038.29) Y2.1@5277.65,3027.07
PC15: C25.1 U3.9 Y2.2 | length 522.3
  Top Layer w10: U3.9@5106.13,3139.26 5272.74,3139.26 5369,3043 ; C25.1@5361.93,2941.57 ccw(c5344.86,2958.64) 5369,2958.64 ccw(c5393.14,2958.64) C25.1@5376.07,2941.57 ; Y2.2@5361.93,2992.93 cw(c5344.86,2975.86) 5369,2975.86 cw(c5393.14,2975.86) Y2.2@5376.07,2992.93 ; Y2.2@5362.18,3027.31 ccw(c5347.55,3043) 5369,3043 ; C25.1@5369,2934.5 Y2.2@5369,3010 5369,3043 ; Y2.2@5375.82,3027.31 cw(c5390.45,3043) 5369,3043
PD0: U3.81
PD1: U3.82
PD2: U3.83
PD3: U3.84
PD4: U3.85
PD5: P1.2 U3.86 | length 1447.5
  Top Layer w10: P1.2@4246.66,2064.34 ccw(c4209.61,2101.39) 4262,2101.39 ; P1.2@4253.73,2057.27 ccw(c4233.76,2077.24) 4262,2077.24 ; P1.2@4254.44,2069.59 ccw(c4249.61,2081) 4262,2081 ; 4260.42,2082.58 cw(c4244.04,2066.2) P1.2@4260.74,2050.14 ; 4262,2086.9 ccw(c4303.9,2086.9) P1.2@4274.27,2057.27 ; 4262,2111.04 ccw(c4328.04,2111.04) P1.2@4281.34,2064.34 ; P1.2@4264,2047 4264,2079 4262,2081 ; P1.2@4269.96,2070.79 cw(c4272.52,2081) 4262,2081 ; U3.86@4762.63,2913.87 4762.63,2811.63 4671,2720 4398,2720 4262,2584 4262,2081
PD6: P1.3 U3.87 | length 1365.2
  Top Layer w10: P1.3@4339.47,2047 ccw(c4280.26,2047) 4322.13,2088.87 ccw(c4364,2130.74) P1.3@4364,2071.53 ; P1.3@4349.47,2047 ccw(c4314.4,2047) 4339.2,2071.8 ccw(c4364,2096.6) P1.3@4364,2061.53 ; P1.3@4364,2047 4301,2110 4301,2524 4471,2694 4684,2694 4782.31,2792.32 U3.87@4782.31,2913.87
PD7: U3.88
PE0: U3.97
PE1: U3.98
PE2: U3.1
PE3: U3.2
PE5: U3.4
PE6: U3.5
PE7: U3.38
PE8: U3.39
PE9: U3.40
PE10: U3.41
PE11: U3.42
PE12: U3.43
PE13: U3.44
PE14: U3.45
PE15: U3.46
RESET#: C26.2 CN2.15 R23.1 S1.1@5824,2694 U1.29 U3.14 | length 6159.5
  Top Layer w10: v1(3416,2792) 3449.47,2825.47 U1.29@3449.47,2913.68 ; v1@3416,2804.72 ccw(c3416,2835.42) 3437.71,2813.71 ccw(c3459.42,2792) v1@3428.72,2792 ; U3.14@5106.13,3237.68 5289.68,3237.68 5516,3464 5822,3464 5879,3407 5879,2748 5825,2694 S1.1@5824,2694 5774.5,2644.5 C26.2@5774.5,2567 5774.5,2490 R23.1@5773.5,2489 ; v2@5762.83,2463.17 ccw(c5737.08,2488.92) R23.1@5773.5,2488.92 ; R23.1@5766.43,2481.93 cw(c5749.36,2464.86) 5773.5,2464.86 cw(c5797.64,2464.86) R23.1@5780.57,2481.93 ; R23.1@5766.43,2496.07 ccw(c5746.94,2515.56) 5774.5,2515.56 ; C26.2@5767.43,2559.93 cw(c5750.36,2542.86) 5774.5,2542.86 cw(c5798.64,2542.86) C26.2@5781.57,2559.93 ; C26.2@5767.43,2574.07 ccw(c5750.36,2591.14) 5774.5,2591.14 ccw(c5798.64,2591.14) C26.2@5781.57,2574.07 ; 5774.5,2510.73 ccw(c5795.23,2510.73) R23.1@5780.57,2496.07 ; v2(5776,2450) 5773.5,2452.5 R23.1@5773.5,2489 ; 5782.13,2652.13 ccw(c5740.26,2694) S1.1@5799.47,2694 ; v2@5786.17,2465.6 cw(c5801.44,2489) R23.1@5773.5,2489 ; 5799.2,2669.2 ccw(c5774.4,2694) S1.1@5809.47,2694 ; S1.1@5838.53,2694 cw(c5871.19,2694) 5848.09,2717.09 ; S1.1@5848.53,2694 cw(c5905.33,2694) 5865.16,2734.16
  Bottom Layer w10: v1@3403.28,2792 cw(c3372.58,2792) 3394.29,2770.29 cw(c3416,2748.58) v1@3416,2779.28 ; v1(3416,2792) 3374,2750 3374,2307 3452,2229 4765,2229 4838,2156 CN2.15@4838,2139 4889,2088 5610,2088 5777,2255 v2@5777,2450 ; 4784.11,2209.89 cw(c4713.22,2139) CN2.15@4813.47,2139 ; 4801.18,2192.82 cw(c4747.36,2139) CN2.15@4823.47,2139 ; 4818.25,2175.75 cw(c4781.5,2139) CN2.15@4833.47,2139 ; 4825.15,2168.85 ccw(c4838,2181.7) CN2.15@4838,2163.53 ; CN2.15@4838,2114.47 cw(c4838,2055.26) 4879.87,2097.13 cw(c4921.74,2139) CN2.15@4862.53,2139 ; CN2.15@4838,2124.47 cw(c4838,2089.4) 4862.8,2114.2 cw(c4887.6,2139) CN2.15@4852.53,2139 ; v2@5762.83,2436.83 cw(c5728.63,2402.63) 5777,2402.63 ; 5777,2407.46 cw(c5818.54,2407.46) v2@5789.17,2436.83
RF_CLKM: U2.5
VDDA: C17.1 C18.1 L1.2 R18.1 U3.22 | length 1053.5
  Top Layer w10: U3.22@5106.13,3395.17 5188.67,3395.17 C17.1@5472.5,3679 ; C18.1@5437.59,3842.13 5471.5,3808.22 L1.2@5471.5,3748 5471.5,3680 C17.1@5472.5,3679 ; C18.1@5441.03,3817.74 cw(c5449.83,3793.7) 5467.92,3811.8 ; C18.1@5457.59,3827.13 ccw(c5469.67,3827.13) C18.1@5461.13,3818.59 ; C17.1@5462.5,3679 cw(c5438.36,3679) 5455.43,3661.93 cw(c5472.5,3644.86) 5472.5,3669 cw(c5472.5,3644.86) 5489.57,3661.93 cw(c5506.64,3679) C17.1@5482.5,3679 ; L1.2@5464.43,3740.93 cw(c5447.36,3723.86) 5471.5,3723.86 cw(c5495.64,3723.86) L1.2@5478.57,3740.93 ; L1.2@5464.43,3755.07 ccw(c5447.36,3772.14) 5471.5,3772.14 ccw(c5495.64,3772.14) L1.2@5478.57,3755.07 ; C17.1@5465.43,3686.07 ccw(c5450.77,3700.73) 5471.5,3700.73 ; 5471.5,3705.56 ccw(c5499.06,3705.56) C17.1@5479.57,3686.07 ; 5500.53,3650.97 cw(c5459.56,3610) R18.1@5517.5,3610 ; 5517.6,3633.9 cw(c5493.7,3610) R18.1@5527.5,3610 5527.5,3624 C17.1@5472.5,3679
VREF+: C29.1 R18.2 U3.21 | length 641.3
  Top Layer w10: U3.21@5106.13,3375.48 5201.48,3375.48 5436,3610 R18.2@5472.5,3610 C29.1@5472.5,3546 ; C29.1@5465.43,3553.07 ccw(c5448.36,3570.14) 5472.5,3570.14 ccw(c5496.64,3570.14) C29.1@5479.57,3553.07 ; R18.2@5465.43,3617.07 cw(c5448.36,3634.14) 5448.36,3610 cw(c5448.36,3585.86) 5465.43,3602.93 cw(c5448.36,3585.86) 5472.5,3585.86 cw(c5496.64,3585.86) R18.2@5479.57,3602.93
pads on no net: CN1.0 CN1.7 CN3.2 CN3.3 RS3.3 RS3.4 RS6.1 RS6.2 S1.1@5574,2694 S1.2@5574,2814 U1.8 U1.9 U1.10 U1.11 U1.12 U2.1 U2.7 U2.8 U2.14 U3.73
copper on no net:
  other v4: 5246.39,4651.69 5419.61,4651.69

## Polygon pours and split planes (outlines as drawn)
GND on Top Layer "Top Layer-No Net" (solid, remove dead copper, pour order 1000): 2076,1976 2084,1984 6000,1984 5998,1986 5998,4903 5997,4902 2080,4902 2076,4898 2076,1976
GND on Bottom Layer "Top Layer-No Net" (solid, remove dead copper, pour order 1001): 2079,4902 2075,4898 2075,1977 2081,1983 5998,1983 5998,4903 2080,4903 2079,4902

## Keep-outs
Keep-Out Layer:
  lines w10: 2075,2157.65 2075,4746 ; 2075,3664 2077,3662 2081,3658 2575,3658 2575,4894 2578,4897 ; 2075.42,4745.95 cw(c2246,4726) 2250.02,4897.7 ; 2075.79,2154.77 ccw(c2256,2163) 2248.99,1982.74 ; 2230,4897 5831,4897 ; 2246,1983 5809.72,1983 ccw(c5791,2183) 5991.87,2183 ; 3605,2954 3606,2953 ; 5819.4,4895.52 cw(c5830.42,4735.08) 5991,4744 ; 5992,2184 5992,4738

## Silkscreen, mask and mechanical layers (free items; w line width, h text height)
Top Overlay:
  text "OFC-6LBR" at 2516.31,2130.5 h100
Top Solder:
  text "6LoWPAN Border Router" at 2915.31,2056.5 h30

## Text inside footprints (layer, text, board x,y; h text height)
U2: Top Overlay "AT89RF231" at 2253,4109 h30 r90; Top Overlay "IEEE 802.15.4 Wireless" at 2320,4111 h30 r90